# Altium PCB HW_ADHERENT_SYSCTRL_R1.PcbDoc (part 1 of 3)
Units mm, origin at the board's own origin, x right, y up, seen from the top; angles counter-clockwise.
Board outline 160 x 150 mm, 4 copper layers (Top Layer, Int1 (GND), Int2 (PWR), Bottom Layer), stack 1.369 mm thick; 228 components, 143 nets, 829 pads, 0 vias.
Unrouted connection lines stored in the file: 328.
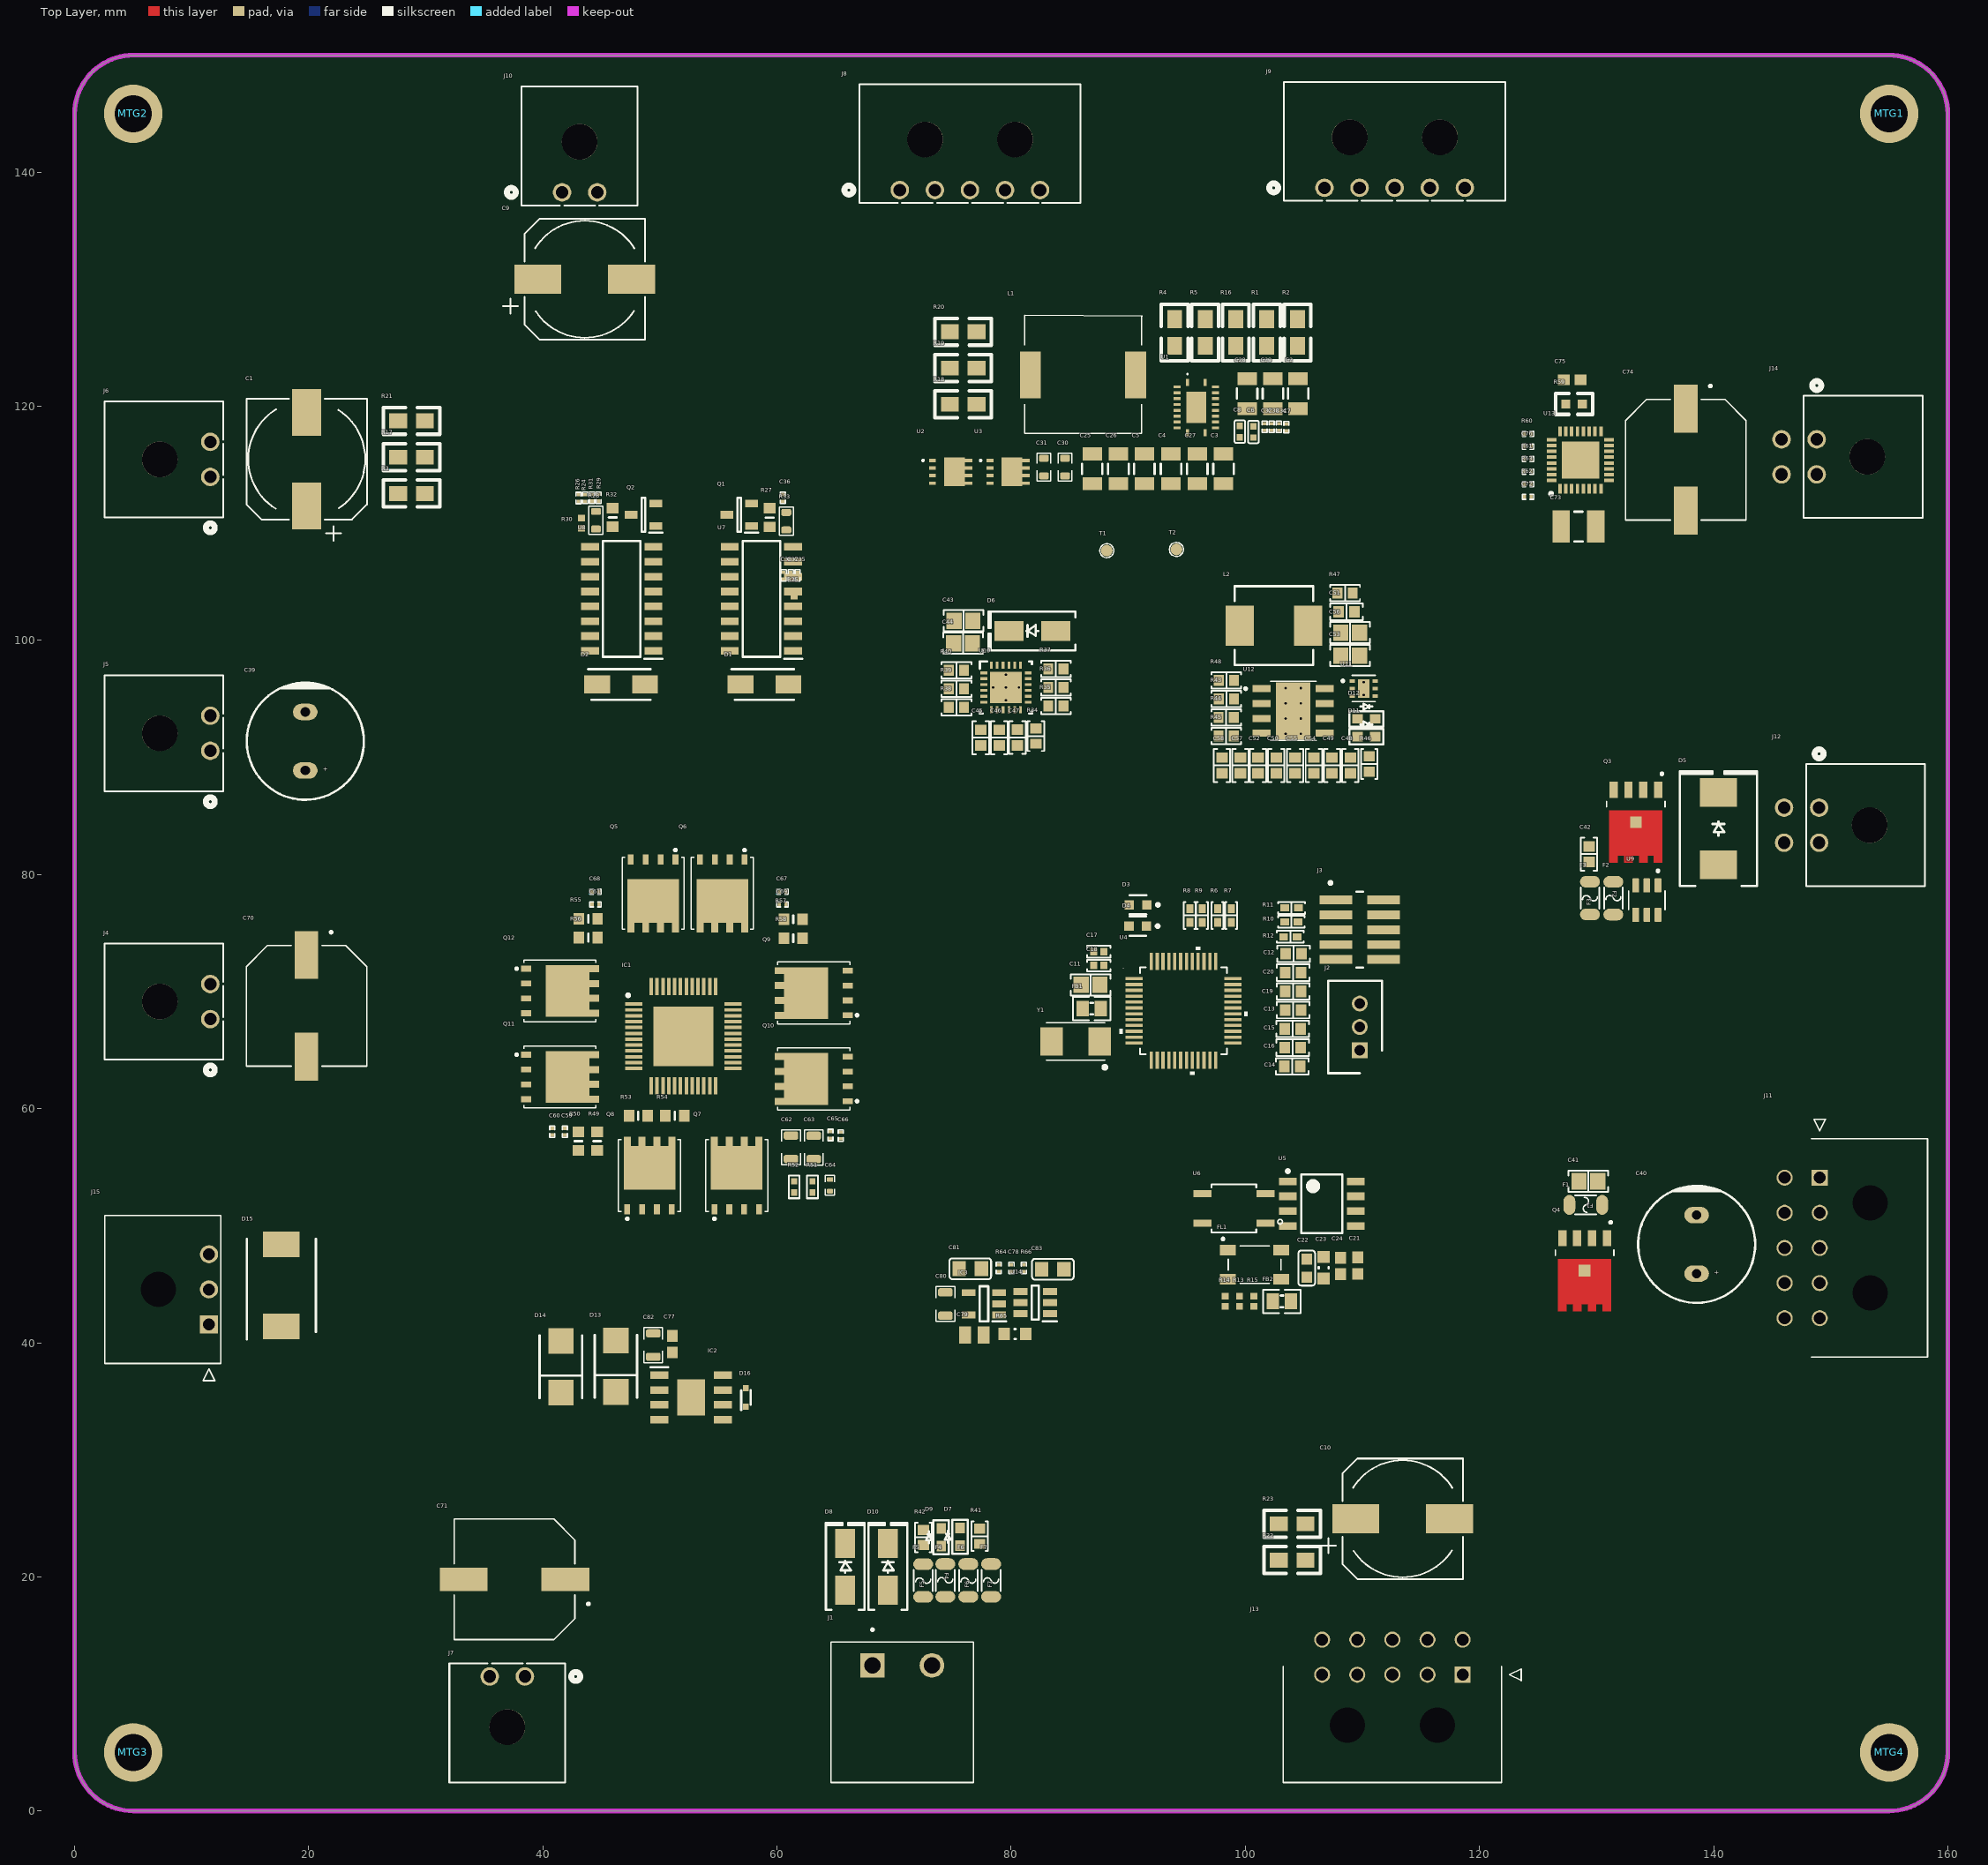
[diagram p0: Top Layer view]
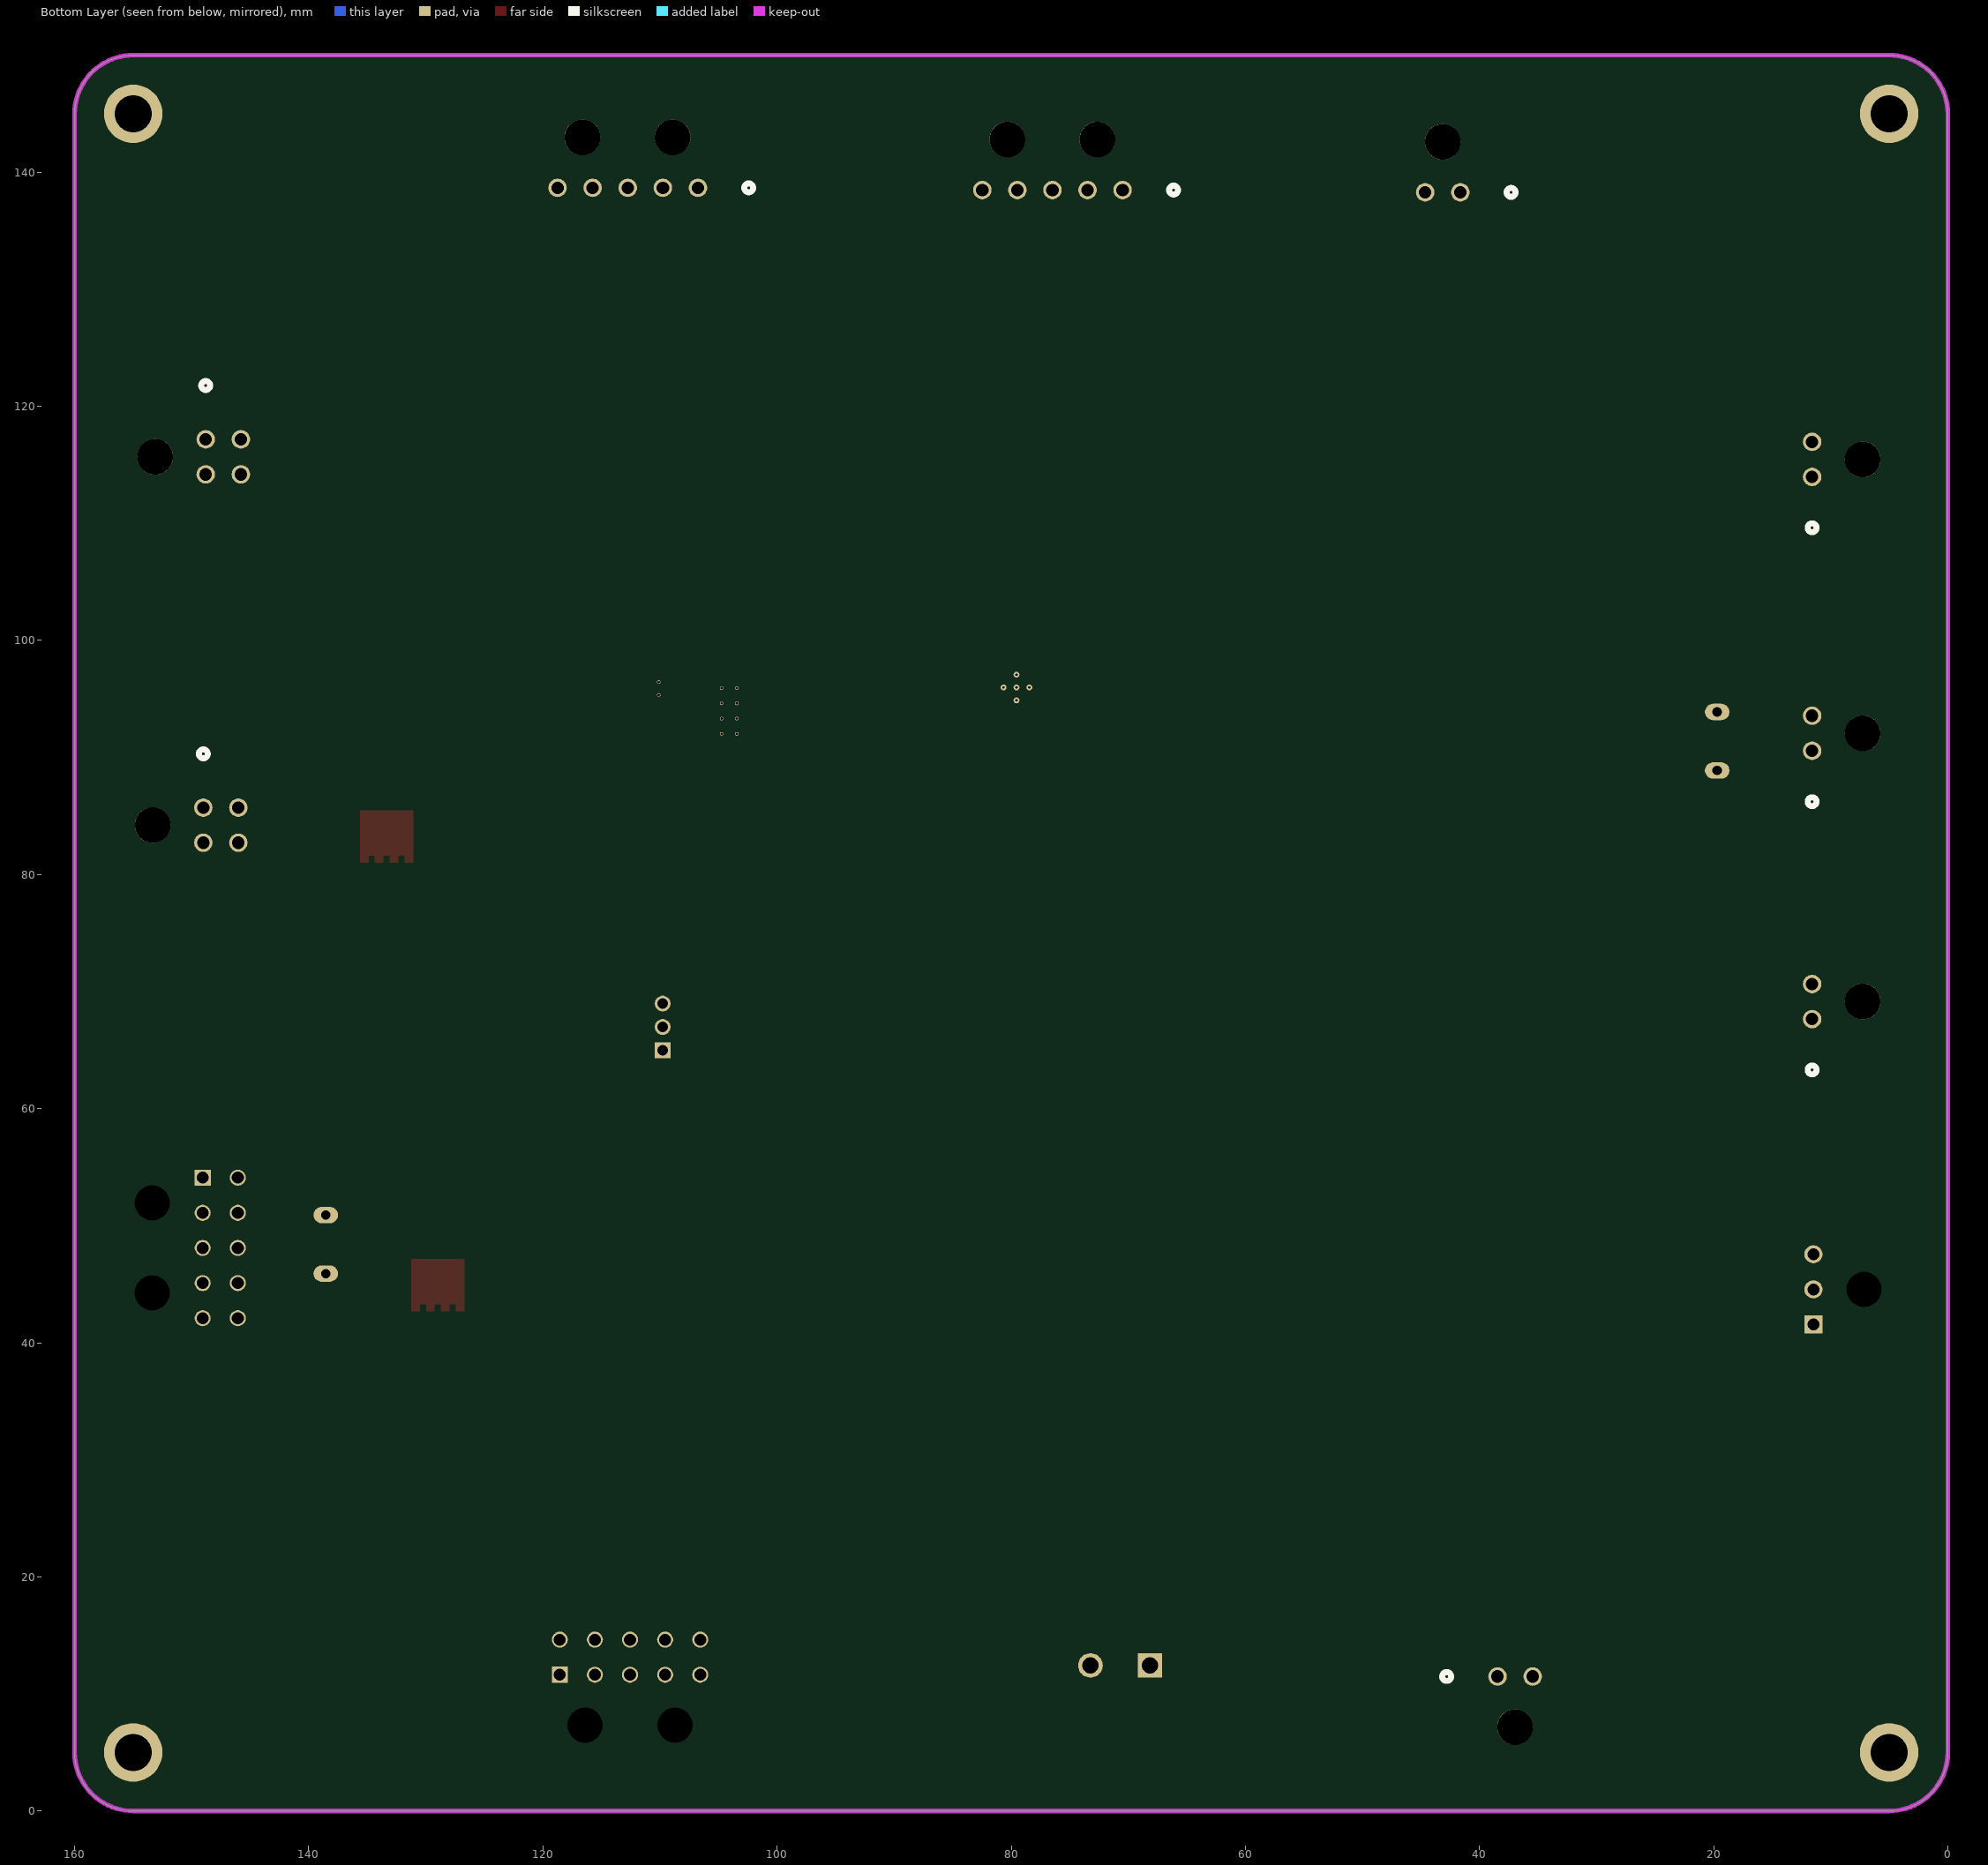
[diagram p1: Bottom Layer view, seen from below]
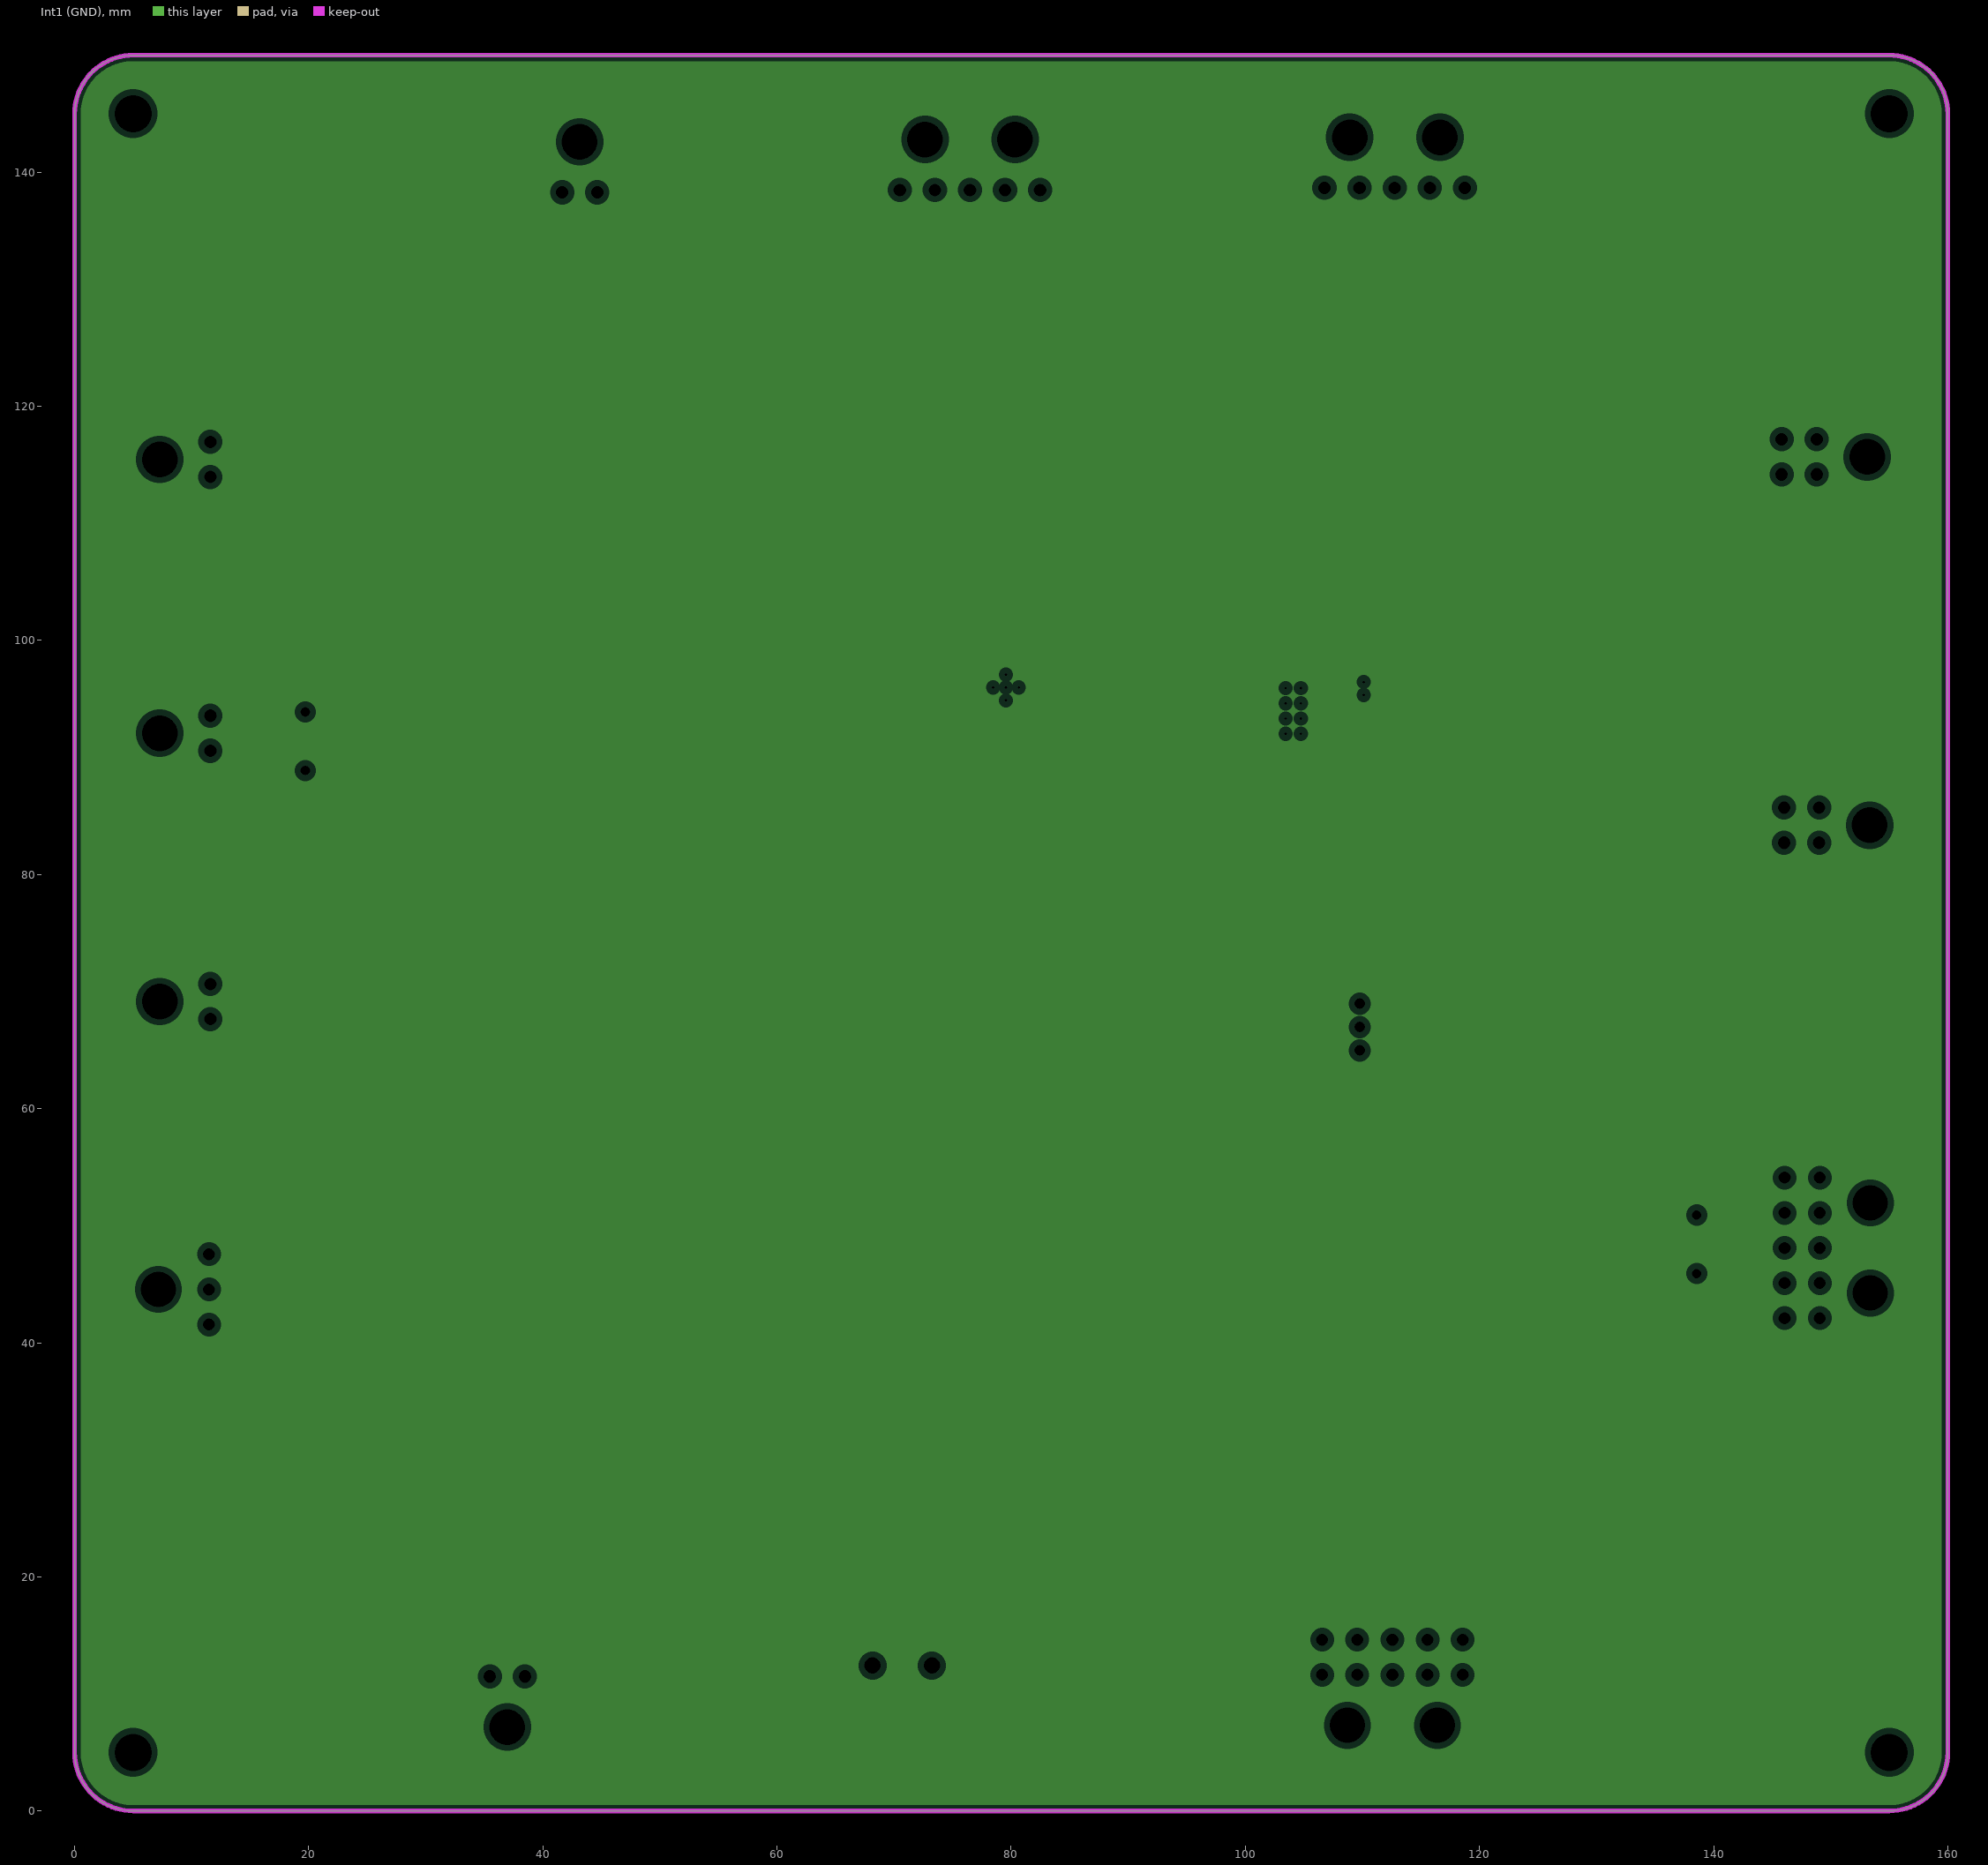
[diagram p2: Int1 (GND), clearances drawn from the general rule]
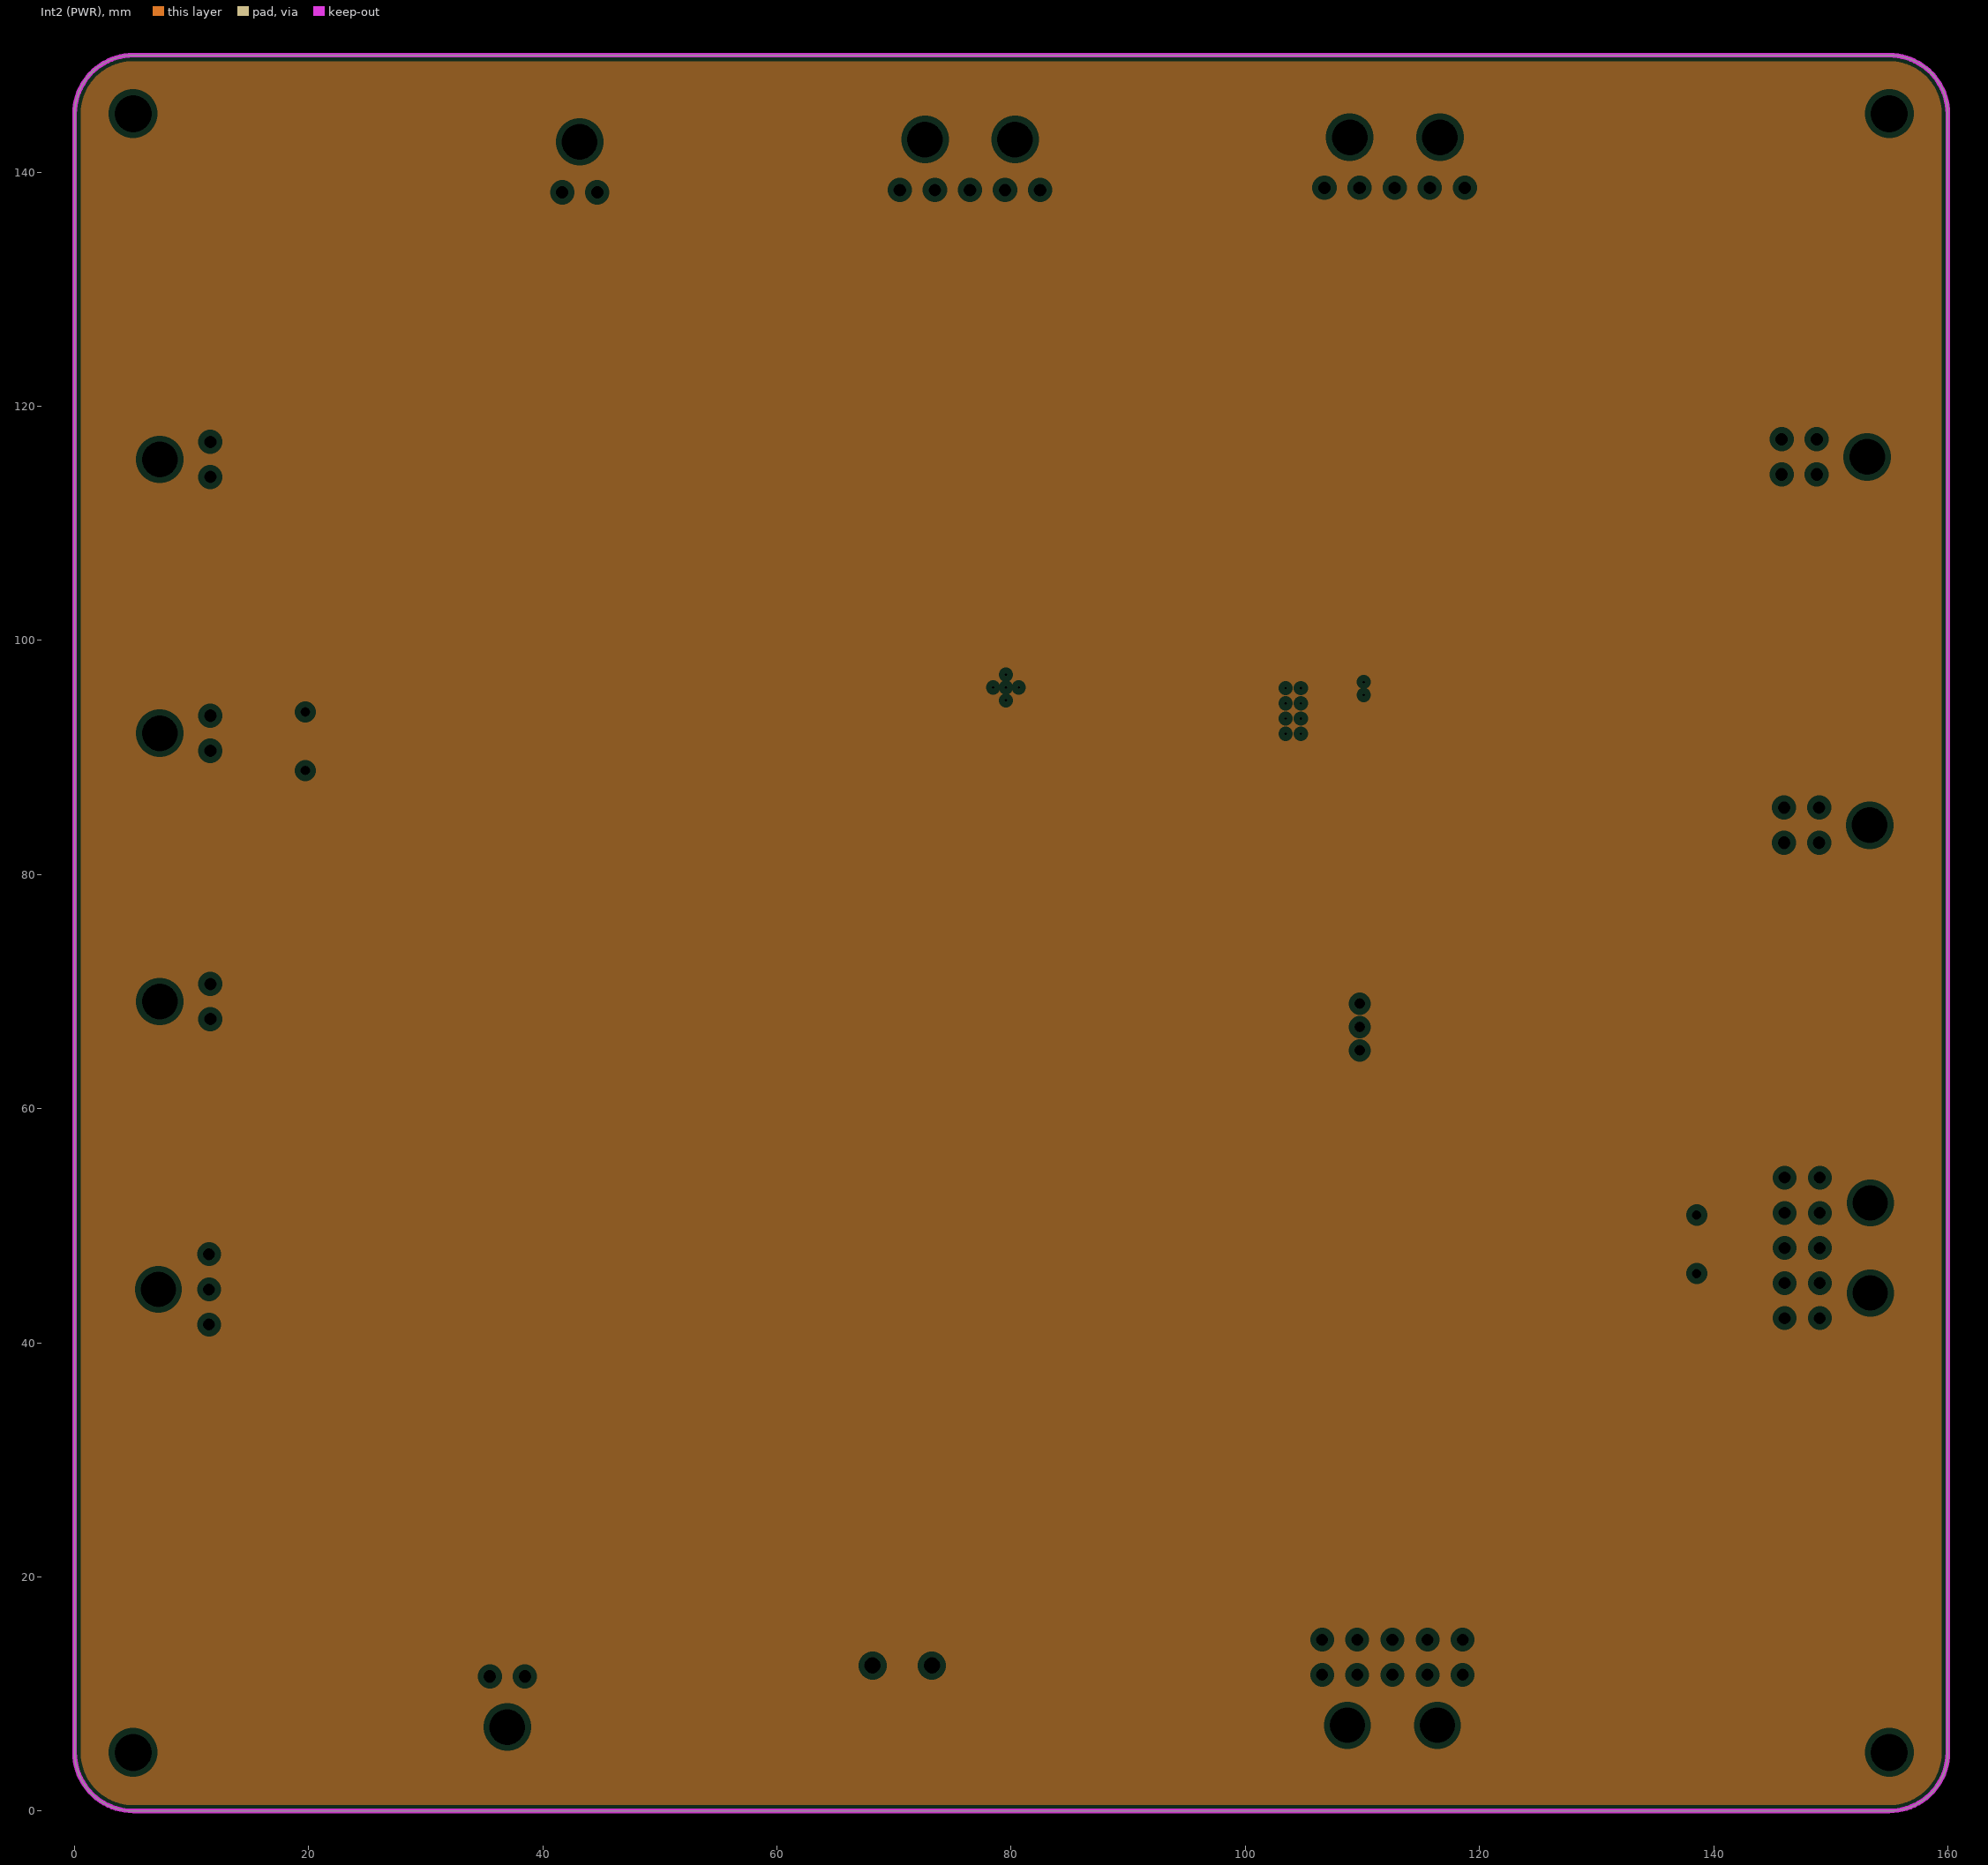
[diagram p3: Int2 (PWR), clearances drawn from the general rule]

## Layer stack, top to bottom
Top Solder: solder mask 0.0254, SM-001, Dk 4
Top Layer: signal copper 0.035
Dielectric 1: prepreg 0.1295, PP-017, Dk 4.3
Dielectric 2: prepreg 0.1295, PP-017, Dk 4.3
Int1 (GND): plane copper 0.035
Dielectric 3: core 0.7112, Core-039, Dk 4.8
Int2 (PWR): plane copper 0.035
Dielectric 4: prepreg 0.1295, PP-017, Dk 4.3
Dielectric 5: prepreg 0.1295, PP-017, Dk 4.3
Bottom Layer: signal copper 0.035
Bottom Solder: solder mask 0.0254, SM-001, Dk 4

## Board outline
0,5 ccw(c5,5) 5,0 155,0 ccw(c155,5) 160,5 160,145 ccw(c155,145) 155,150 5,150 ccw(c5,145) 0,145

## Design rules (kind name [scope] priority, off if disabled: settings)
BoardOutlineClearance [All] p1: gap=0.3 ignorepadtopadclearanceinfootprint=FALSE except(0: Arc-SplitContinuation Track-SplitContinuation SMDPad-SplitContinuation THPad-SplitContinuation Via-SplitContinuation Fill-SplitContinuation Poly-SplitContinuation Region-SplitContinuation Text-SplitContinuation)
Clearance CL_SMPS [InNetClass('SMPS_NOISY') and (IsTrack or IsArc or IsVia)] p1: gap=0.152 ignorepadtopadclearanceinfootprint=TRUE except(0.305: Arc-Poly Track-Poly SMDPad-Poly THPad-Poly Via-Poly Fill-Poly Poly-Poly Poly-Region Poly-Text Poly-Hole)
Clearance CL_CLOCK [InNetClass('CLOCK') and (IsTrack or IsArc or IsVia)] p2: gap=0.25 ignorepadtopadclearanceinfootprint=FALSE
Clearance CL_VIN [InNetClass('PWR_VIN') and (IsTrack or IsArc or IsVia)] p3: gap=0.25 ignorepadtopadclearanceinfootprint=FALSE
Clearance [All] p4: gap=0.15 ignorepadtopadclearanceinfootprint=FALSE
DiffPairsRouting DP_ZDIFF120 [InDifferentialPairClass('ZDIFF120')] p1: maxlimit=0.263 minlimit=0.263 mostfreqgap=0.263 toplayer_minwidth=0.127 toplayer_maxwidth=0.127 toplayer_prefwidth=0.127 bottomlayer_minwidth=0.127 bottomlayer_maxwidth=0.127 bottomlayer_prefwidth=0.127 impedanceprofiledriven=TRUE maxuncoupledlength=5
HoleSize [All] p1: absolutevalues=TRUE maxlimit=4 minlimit=0.2 maxpercent=80.000 minpercent=20.000
HoleToHoleClearance [All] p1: gap=0.5 allowstackedmicrovias=TRUE
MatchedLengths ML_ZDIFF120 [InDifferentialPairClass('ZDIFF120')] p1: tolerance=1 checknetsindiffpair=FALSE checkdiffpairvsdiffpair=TRUE checkxsignals=TRUE checkothers=TRUE
MinimumAnnularRing [All] p1: minimumring=0.13
MinimumSolderMaskSliver MS_U5 [InComponent('U5')] p1: minsoldermaskwidth=0.09
MinimumSolderMaskSliver [All] p2: minsoldermaskwidth=0.1
PlaneClearance [All] p1: clearance=0.508
PlaneConnect [All] p1: planeconnectstyle=Relief reliefexpansion=0.508 reliefentries=4 reliefconductorwidth=0.3 reliefairgap=0.3
PolygonConnect [All] p1: thpad.connectstyle=Relief thpad.reliefconductorwidth=0.3 thpad.reliefentries=4 thpad.polygonreliefangle="90 Angle" thpad.airgapwidth=0.3 smdpad.connectstyle=Direct smdpad.reliefconductorwidth=0.3 smdpad.reliefentries=4 smdpad.polygonreliefangle="90 Angle" smdpad.airgapwidth=0.3 via.connectstyle=Direct via.reliefconductorwidth=0.3 via.reliefentries=4 via.polygonreliefangle="90 Angle" via.airgapwidth=0.3
RoutingVias [All] p1: holewidth=0.3 width=0.6 viastyle="Through Hole" minholewidth=0.2 minwidth=0.45 maxholewidth=0.45 maxwidth=1
SilkToSilkClearance [All] p1: silktosilkclearance=0.15
SilkToSolderMaskClearance [IsPad] p1: minsilkscreentomaskgap=0.05 clearancetoexposedcopper=TRUE
SolderMaskExpansion [All] p1: expansion=0.05 istentingtop=FALSE
SupplyNets "Schematic Supply Nets_8" [InNet('+12V_SYS')] p1: voltage=0.000
SupplyNets "Schematic Supply Nets_6" [InNet('+24V_BUCK_IN')] p2: voltage=0.000
SupplyNets "Schematic Supply Nets_3" [InNet('+12')] p3: voltage=0.000
SupplyNets "Schematic Supply Nets_7" [InNet('+3V3')] p4: voltage=0.000
SupplyNets "Schematic Supply Nets_5" [InNet('GND')] p5: voltage=0.000
Width W_PWR_VIN [InNetClass('PWR_VIN')] p1: maxlimit=2 minlimit=0.4 preferedwidth=1 bottomlayer_minwidth=0.5 minimp=50.000000 maximp=50.000000 favimp=50.000000
Width W_PWR_5V [InNetClass('PWR_5V')] p2: maxlimit=2 minlimit=0.4 preferedwidth=0.6 minimp=50.000000 maximp=50.000000 favimp=50.000000
Width W_PWR_3V3 [InNetClass('PWR_3V3')] p3: maxlimit=1 minlimit=0.3 preferedwidth=0.4 minimp=50.000000 maximp=50.000000 favimp=50.000000
Width W_SMPS_SW [InNetClass('SMPS_NOISY')] p4: maxlimit=3 minlimit=0.254 preferedwidth=0.8 bottomlayer_minwidth=0.5 minimp=50.000000 maximp=50.000000 favimp=50.000000
Width W_CAN_F [InNetClass('CANF')] p5: maxlimit=0.285 minlimit=0.12 preferedwidth=0.127 minimp=50.000000 maximp=50.000000 favimp=50.000000
Width W_ZDIFF120 [InDifferentialPairClass('ZDIFF120')] p6: maxlimit=0.254 minlimit=0.09 preferedwidth=0.102 minimp=50.000000 maximp=50.000000 favimp=50.000000
Width [All] p7: maxlimit=0.5 minlimit=0.15 preferedwidth=0.2 minimp=50.000000 maximp=50.000000 favimp=50.000000
22 further rules are at their usual default settings.

## Classes and differential pairs
component class POWER_5: C48 C49 C50 C51 C52 C53 C54 C55 C56 C57 C58 D11 D12 L2 R43 R44 R45 R46 R47 R48 U11 U12
component class POWER_4: D7 D8 D9 D10 F4 F5 F6 F7 J8 J9 J10 R41 R42
component class POWER_3: C43 C44 C45 C46 C47 D6 J7 R34 R35 R36 R37 R38 R39 R40 U10
component class DRIVER_3: C70 C71 C72 C73 C74 C75 C76 D13 D14 FL J14 R59 R60 R61 R62 R63 U13
component class DRIVER_2: C59 C60 C61 C62 C63 C64 C65 C66 C67 C68 C69 IC1 Q5 Q6 Q7 Q8 Q9 Q10 Q11 Q12 R49 R50 R51 R52 R53 R54 R55 R56 R57 R58
component class DRIVER4: C77 C78 C79 C80 C81 C82 C83 D15 D16 IC2 IC3 J15 R64 R65 R66 U14
component class 09_CONNECTOR: J11 J12 J13
component class 07_CAN: C21 C22 C23 C24 FB2 FL1 R13 R14 R15 U5 U6
component class 06_DRIVER: C35 C36 C37 C38 D1 D2 Q1 Q2 R24 R25 R26 R27 R28 R29 R30 R31 R32 R33 U7 U8
component class 04_POWER_2: C39 C40 C41 C42 D5 F1 F2 F3 J1 J4 J5 J6 Q3 Q4 U9
component class 03_POWER1: C1 C2 C3 C4 C5 C6 C7 C8 C9 C10 C25 C26 C27 C28 C29 C30 C31 C32 C33 C34 L1 R1 R2 R3 R4 R5 R16 R17 R18 R19 R20 R21 R22 R23 T1 T2 U1 U2 U3
net class CAN_BUS: CAN1_N CAN1_P
differential pair class ZDIFF120: CAN1
net class CAN1: CAN1_N CAN1_P
component class 05_MCU: C11 C12 C13 C14 C15 C16 C17 C18 C19 C20 D3 D4 FB1 J2 J3 MTG1 MTG2 MTG3 MTG4 R6 R7 R8 R9 R10 R11 R12 U4 Y1
differential pair CAN1: +CAN1_P -CAN1_N

## Components (designator, comment, footprint, x,y, rotation, side; value= is the part's Value field where it differs from the comment)
C1 "100uF" "SMD 10.3x10.3x10.0mm" 19.826,115.49 r180 top
C2 "4.7uF" CAP1206 104.51,121.09 r90 top value="4.7uF 100V"
C3 "4.7uF" CAP1206 98.13,114.66 r90 top value="4.7uF 100V"
C4 "4.7uF" CAP1206 93.65,114.66 r90 top value="4.7uF 100V"
C5 "4.7uF" CAP1206 91.37,114.66 r90 top value="4.7uF 100V"
C6 "0.1uF" 0402_C 100.69,117.813 r90 top
C7 "100nF" CAPC0603X03L_C 103.51,118.21 r90 top
C8 "0.1uF" 0402_C 99.53,117.843 r90 top
C9 "100uF" "SMD 10.3x10.3x10.0mm" 43.57,130.86 r90 top
C10 "100uF" "SMD 10.3x10.3x10.0mm" 113.439,24.961 r90 top
C11 "4.7 µF" "CAP 0805_2012" 86.775,70.577 r180 top
C12 "GCM188R71H104KA57J" "CAP 0603_1608" 104.109,73.238 r180 top
C13 "GCM188R71H104KA57J" "CAP 0603_1608" 104.08,68.42 r180 top
C14 "GCM188R71H104KA57J" "CAP 0603_1608" 104.017,63.613 r180 top
C15 "GCM188R71H104KA57J" "CAP 0603_1608" 104.05,66.812 r180 top
C16 "GCM188R71H104KA57J" "CAP 0603_1608" 104.05,65.214 r180 top
C17 "8.2 pF" "CAP 0402_1005" 87.475,73.417 r180 top
C18 "8.2 pF" "CAP 0402_1005" 87.475,72.227 r180 top
C19 "1 µF" "CAP 0603_1608" 104.092,70.023 r180 top
C20 "10000 pF" "CAP 0603_1608" 104.092,71.621 r180 top
C21 "47pF" CAPC1608X100N 109.6,46.59 r90 top
C22 "10uF" 0603_C 105.239,46.38 r90 top
C23 "100nF" CAP0603 106.69,46.41 r90 top value="100nF 50V"
C24 "47pF" CAPC1608X100N 108.12,46.56 r90 top
C25 "22uF" CAP1206 86.92,114.66 r90 top value="22uF 35V"
C26 "22uF" CAP1206 89.16,114.66 r90 top value="22uF 35V"
C27 "22uF" CAP1206 95.89,114.66 r90 top value="22uF 35V"
C28 "22uF" CAP1206 100.15,121.09 r90 top value="22uF 35V"
C29 "22uF" CAP1206 102.36,121.09 r90 top value="22uF 35V"
C30 "CAP CER 8.2PF 50V C0G/NPO 0603" SMC0603 84.597,114.813 r90 top value=8.2pF
C31 "CAP CER 4.7UF 25V X5R 0603" SMC0603 82.789,114.813 r90 top value=2.2uF
C32 "120p" CAPC0603X03L_C 101.635,118.25 r90 top value=100nF
C33 "3.9nF" CAPC0603X03L_C 102.238,118.25 r90 top value=100nF
C34 "12nF" CAPC0603X03L_C 102.865,118.25 r90 top value=100nF
C35 "100nF" CAPC0603X03L_C 61.75,105.545 r270 top
C36 "10nF" CAPC0603X03L_C 60.49,112.185 r270 top
C37 "100nF" CAPC0603X03L_C 61.17,105.545 r270 top
C38 "10nF" CAPC0603X03L_C 60.57,105.545 r270 top
C39 "470µF" "CAP TH ALUM ELEC D10.00mm S5.00mm H22.00mm" 19.7,91.39 r270 top
C40 "470µF" "CAP TH ALUM ELEC D10.00mm S5.00mm H22.00mm" 138.55,48.41 r270 top
C41 "1µF" "CAP 0805_2012" 129.305,53.798 r0 top
C42 "0.47 µF" "CAP 0603_1608" 129.36,81.74 r270 top
C43 "1µF" "CAP 0805_2012" 75.92,101.682 r180 top
C44 "1µF" "CAP 0805_2012" 75.88,99.762 r180 top
C45 "0.1 µF" "CAP 0603_1608" 77.4,91.692 r90 top
C46 "0.022 µF" "CAP 0603_1608" 78.98,91.692 r90 top
C47 "10000 pF" "CAP 0603_1608" 80.53,91.697 r90 top
C48 "4.7 µF" "CAP 0603_1608" 108.975,89.315 r90 top
C49 "4.7 µF" "CAP 0603_1608" 107.405,89.315 r90 top
C50 "0.1 µF" "CAP 0603_1608" 102.645,89.315 r90 top
C51 "0.1 µF" "CAP 0603_1608" 108.65,102.445 r0 top
C52 "22 µF" "CAP 0603_1608" 101.085,89.315 r90 top
C53 "1µF" "CAP 0805_2012" 108.95,98.705 r180 top
C54 "10 µF" "CAP 0603_1608" 105.855,89.315 r90 top
C55 "22 µF" "CAP 0603_1608" 104.245,89.315 r90 top
C56 "1µF" "CAP 0805_2012" 108.95,100.665 r180 top
C57 "22 µF" "CAP 0603_1608" 99.575,89.315 r90 top
C58 "22 µF" "CAP 0603_1608" 98.005,89.315 r90 top
C59 "100nF" CAPC0603X03L_C 41.873,58.035 r270 top
C60 "22nF" CAPC0603X03L_C 40.8,58.035 r270 top
C61 "100nF" CAPC0603X03L_C 44.485,77.46 r180 top
C62 "CAP CER 4.7UF 50V X5R 0805" SMC0805 61.19,56.7 r90 top value=4.7uF
C63 "CAP CER 4.7UF 50V X5R 0805" SMC0805 63.128,56.689 r90 top value=4.7uF
C64 "CAP CER 0.47UF 10V X5R 0402" CAP0402(1005)x0.5 64.516,53.451 r90 top value=470nF
C65 "100nF" CAPC0603X03L_C 64.55,57.75 r90 top
C66 "100nF" CAPC0603X03L_C 65.443,57.705 r90 top
C67 "100nF" CAPC0603X03L_C 60.47,78.533 r180 top
C68 "100nF" CAPC0603X03L_C 44.485,78.533 r180 top
C69 "100nF" CAPC0603X03L_C 60.47,77.46 r180 top
C70 "47uF 80V" CAP_EEEFK1K470P 19.814,68.78 r270 top
C71 "100uF" CAP_EEEFK1J101P 37.58,19.79 r180 top
C72 "100nF" CAPC0603X03L_C 124.14,112.274 r180 top
C73 "CAP CER 47UF 16V X5R 1210" CAP1210 128.45,109.73 r180 top value="47uF 16V"
C74 "100uF" CAP_EEEFK1J101P 137.62,115.44 r270 top
C75 "2.2uF" CAPC1608X100N 127.91,122.27 r0 top
C76 "22nF" CAPC0603X03L_C 124.14,116.566 r180 top
C77 "47pF" CAPC1608X100N 51.057,39.881 r90 top
C78 "100nF" CAPC0603X03L_C 80.017,46.382 r270 top
C79 "4.7nF" CAP0805 76.857,40.672 r0 top value="4.7nF 1kV"
C80 "CAP CER 4.7UF 50V X5R 0805" SMC0805 74.377,43.312 r270 top value="4.7uF 50V"
C81 "47uF" 0805_C 76.507,46.322 r180 top
C82 "CAP CER 4.7UF 50V X5R 0805" SMC0805 49.427,39.802 r270 top value="4.7uF 50V"
C83 "47uF" 0805_C 83.557,46.282 r180 top
D1 "SS36A" DIOM5026X262N 58.93,96.24 r0 top
D2 "SS36A" DIOM5026X262N 46.68,96.24 r0 top
D3 "LED RED CLEAR SMD" Lite-On_RED_0603 90.83,77.417 r180 top
D4 "LED RED CLEAR SMD" Lite-On_RED_0603 90.81,75.597 r180 top
D5 "SMDJ33A" "DO214AB SMC" 140.41,83.92 r90 top
D6 "SMAJ33A" "DO214AC SMA" 81.8,100.812 r180 top
D7 "LTST-C191KGKT" LED0603 75.624,23.418 r90 top
D8 "SMAJ33A" "DO214AC SMA" 65.824,20.86 r90 top
D9 "LTST-C191KGKT" LED0603 74.024,23.387 r90 top
D10 "SMAJ33A" "DO214AC SMA" 69.469,20.86 r90 top
D11 "LTST-C191KGKT" LED0603 110.341,91.789 r0 top
D12 "LTST-C191KGKT" LED0603 110.341,93.305 r0 top
D13 "SMBJ33A" SMBJ12A 46.234,37.994 r90 top
D14 "SMBJ24A" SMBJ12A 41.53,37.95 r90 top
D15 "B560C" DIOM7959X250N 17.652,44.9 r90 top
D16 "ESD5Z5V0" SODFL1608X70N 57.34,35.33 r90 top
F1 "4A/72V" F1206 129.08,51.778 r180 top
F2 "4A/72V" F1206 131.435,77.98 r270 top
F3 "4A/72V" F1206 129.44,77.99 r90 top
F4 "4A/72V" F1206 74.371,19.698 r270 top
F5 "4A/72V" F1206 72.481,19.688 r90 top
F6 "4A/72V" F1206 76.341,19.698 r90 top
F7 "4A/72V" F1206 78.281,19.698 r90 top
FB1 "BLM21PG121SN1D" INDC2012X11L 86.874,68.547 r0 top value=120R/0.55A
FB2 "BLM21PG121SN1D" INDC2012X11L 103.13,43.53 r0 top value=120R/0.55A
FL1 "ACT45B-510-2P-TL003" FIL_ACT45B-510-2P-TL003 100.79,46.67 r0 top
IC1 "TMC5160-TA" QFP50P900X900X120-49N 51.999,66.187 r0 top
IC2 "TPS54560BDDAR" SOIC127P600X170-9N 52.66,35.33 r0 top
IC3 "74AHCT1G125W5-7" SOT95P285X140-5N 77.67,43.33 r180 top
J1 "1757242" PHOENIX_1757242 70.69,8.433 r0 top
J2 "SWR201-NRTN-S03-SA-WH" SHDR3W50P0X200_1X3_790X460X630P 109.77,64.977 r90 top
J3 "CONN HEADER SMD 10POS 1.27MM" Samtec_0_MFG 109.77,75.287 r270 top
J4 "436500200" CONN_SD-43650-001_02_MOL 11.588,67.651 r270 top
J5 "436500200" CONN_SD-43650-001_02_MOL 11.588,90.571 r270 top
J6 "436500200" CONN_SD-43650-001_02_MOL 11.588,113.971 r270 top
J7 "436500200" CONN_SD-43650-001_02_MOL 38.459,11.488 r0 top
J8 "436500500" CONN_SD-43650-001_05_MOL 70.481,138.482 r180 top
J9 "436500500" CONN_SD-43650-001_05_MOL 106.761,138.672 r180 top
J10 "436500200" CONN_SD-43650-001_02_MOL 41.641,138.282 r180 top
J11 "430451000" 430451010 149.062,54.1 r90 top
J12 "0430450400" CONN_SD-43045-001_04_MOL 149.012,85.72 r90 top
J13 "430451000" 430451010 118.56,11.638 r0 top
J14 "0430450400" CONN_SD-43045-001_04_MOL 148.802,117.189 r90 top
J15 "43650-0300" 436500300 11.479,41.56 r270 top
L1 "6.8uH" SRU10386R2Y 86.14,122.7 r0 top
L2 "FIXED IND 8.2UH 4A 68 MOHM SMD" Vishay_IHLP-2525CZ-FP_2_413x3_429-3D_3_0_MFG 102.44,101.275 r0 top value=8.2uH
MTG1 "Mounting Hole, 3MM" MTG-PTH-3MM 155,145 r0 top
MTG2 "Mounting Hole, 3MM" MTG-PTH-3MM 5,145 r90 top
MTG3 "Mounting Hole, 3MM" MTG-PTH-3MM 5,5 r90 top
MTG4 "Mounting Hole, 3MM" MTG-PTH-3MM 155,5 r90 top
Q1 "DMN6140L-7" SOT96P240X110-3N 56.774,110.741 r180 top
Q2 "DMN6140L-7" SOT96P240X110-3N 48.596,110.741 r180 top
Q3 "CSD18540Q5B" TRANS_CSD18540Q5B 133.356,84.477 r270 top
Q4 "CSD18540Q5B" TRANS_CSD18540Q5B 128.981,46.159 r270 top
Q5 "BSC072N08NS5" BSC080N03LSG 49.412,78.63 r180 top
Q6 "BSC072N08NS5" BSC080N03LSG 55.32,78.63 r180 top
Q7 "BSC072N08NS5" BSC080N03LSG 56.55,54.056 r0 top
Q8 "BSC072N08NS5" BSC080N03LSG 49.104,54.056 r0 top
Q9 "BSC072N08NS5" BSC080N03LSG 63.371,69.885 r90 top
Q10 "BSC072N08NS5" BSC080N03LSG 63.371,62.538 r90 top
Q11 "BSC072N08NS5" BSC080N03LSG 41.222,62.708 r270 top
Q12 "BSC072N08NS5" BSC080N03LSG 41.222,70.055 r270 top
R1 "200k" 0805 101.83,125.174 r90 top
R2 "4.7" 0805 104.45,125.174 r90 top
R3 "14.3k" 0805 29.926,112.559 r180 top
R4 "24.9k" 0805 93.967,125.174 r90 top
R5 "0 Ohms" 0805 96.57,125.174 r90 top
R6 "10 kOhms" "RES 0402_1005" 97.62,76.507 r90 top
R7 "10 kOhms" "RES 0402_1005" 98.79,76.507 r90 top
R8 "10 kOhms" "RES 0402_1005" 95.26,76.507 r90 top
R9 "10 kOhms" "RES 0402_1005" 96.31,76.507 r90 top
R10 "0 Ohms" "RES 0402_1005" 103.931,75.967 r180 top
R11 "1 kOhms" "RES 0402_1005" 103.945,77.156 r180 top
R12 "1 kOhms" "RES 0402_1005" 103.846,74.687 r180 top
R13 "56 Ohms" RES_0402 99.502,43.533 r90 top
R14 "56 Ohms" RES_0402 98.294,43.533 r90 top
R15 "330 Ohms" RES_0402 100.71,43.533 r90 top
R16 "0 Ohms" 0805 99.18,125.174 r90 top
R17 "750 Ohms" 0805 29.926,115.658 r180 top
R18 "0 Ohms" 0805 77.046,120.173 r180 top
R19 "10k" 0805 77.046,123.272 r180 top
R20 "390" 0805 77.046,126.371 r180 top
R21 "6.81k" 0805 29.926,118.757 r180 top
R22 "10k" 0805 105.146,21.436 r180 top
R23 "715" 0805 105.146,24.535 r180 top
R24 "10kOhms" RESC0603X03L_C 43.61,112.18 r270 top
R25 "4.7kOhms" RES_0402 61.46,103.35 r270 top
R26 "1kOhms" RESC0603X03L_C 43.04,112.17 r270 top
R27 "100 Ohms" RESC1608X55N 59.37,110.5 r270 top
R28 "RES 180K OHM 1% 1/10W 0603" SMR0603 44.53,110.27 r270 top value=100k
R29 "10kOhms" RESC0603X03L_C 44.76,112.19 r270 top
R30 "4.7kOhms" RES_0402 43.29,110.025 r270 top
R31 "1kOhms" RESC0603X03L_C 44.19,112.19 r270 top
R32 "100 Ohms" RESC1608X55N 45.96,110.51 r270 top
R33 "RES 180K OHM 1% 1/10W 0603" SMR0603 60.79,110.19 r270 top value=100k
R34 "110 kOhms" "RES 0603_1608" 82.11,91.827 r90 top
R35 "110 kOhms" "RES 0603_1608" 83.82,94.402 r180 top
R36 "17.8 kOhms" "RES 0603_1608" 83.82,95.982 r180 top
R37 "3.57 kOhms" "RES 0603_1608" 83.82,97.572 r180 top
R38 "7.15 kOhms" "RES 0603_1608" 75.32,94.287 r180 top
R39 "10 kOhms" "RES 0603_1608" 75.32,95.867 r180 top
R40 "1 kOhms" "RES 0603_1608" 75.32,97.457 r180 top
R41 "1 kOhms" "RES 0603_1608" 77.294,23.468 r90 top
R42 "1 kOhms" "RES 0603_1608" 72.503,23.365 r90 top
R43 "110 kOhms" "RES 0603_1608" 98.38,95.005 r0 top
R44 "110 kOhms" "RES 0603_1608" 98.37,93.435 r0 top
R45 "24.9 kOhms" "RES 0603_1608" 98.37,91.835 r0 top
R46 "2.2 kOhms" "RES 0603_1608" 110.575,89.445 r90 top
R47 "1 kOhms" "RES 0603_1608" 108.52,104.045 r180 top
R48 "10 kOhms" "RES 0603_1608" 98.382,96.579 r0 top
R49 "10 Ohms" RESC1608X55N 44.633,57.22 r90 top
R50 "10 Ohms" RESC1608X55N 43.025,57.22 r90 top
R51 "2.2K" 0402_R 63.025,53.31 r90 top
R52 "0R" 0402_R 61.45,53.31 r90 top
R53 "10 Ohms" RESC1608X55N 48.15,59.39 r180 top
R54 "10 Ohms" RESC1608X55N 51.26,59.39 r180 top
R55 "10 Ohms" RESC1608X55N 43.87,76.225 r180 top
R56 "10 Ohms" RESC1608X55N 43.87,74.617 r180 top
R57 "10 Ohms" RESC1608X55N 61.38,76.173 r180 top
R58 "10 Ohms" RESC1608X55N 61.38,74.565 r180 top
R59 "24k" 0603 127.383,120.2 r0 top
R60 "10kOhms" RESC0603X03L_C 124.14,117.639 r180 top
R61 "10kOhms" RESC0603X03L_C 124.14,115.493 r180 top
R62 "10kOhms" RESC0603X03L_C 124.14,113.347 r180 top
R63 "10kOhms" RESC0603X03L_C 124.14,114.42 r180 top
R64 "10kOhms" RESC0603X03L_C 78.944,46.382 r270 top
R65 "100k %1" RESIS_0603 80.327,40.742 r0 top
R66 "10kOhms" RESC0603X03L_C 81.09,46.382 r270 top
T1 "SMD" TEST_POINT 88.16,107.675 r0 top
T2 "SMD" TEST_POINT 94.11,107.775 r0 top
U1 "LM5146RGYR" LM5146RGYR 95.81,119.91 r0 top
U2 "CSD18543Q3A" CSD18543Q3A 74.824,114.408 r0 top
U3 "CSD18543Q3A" CSD18543Q3A 79.732,114.408 r0 top
U4 "STM32F103C8T6" LQFP48_STM 94.72,68.357 r0 top
U5 "SN65HVD232DR" SOIC8 106.53,51.88 r0 top
U6 "CPC1014NTR" 4-SOP 99.03,51.48 r180 top
U7 "AM26C31IDR" SOIC127P600X175-16N 58.661,103.548 r180 top
U8 "AM26C31IDR" SOIC127P600X175-16N 46.733,103.548 r180 top
U9 "LM74700QDBVRQ1" SOT95P280X145-6N/LM74700QDBVRQ1 134.296,77.813 r270 top
U10 "TPS16637RGER" RGE0024H 79.55,95.982 r0 top
U11 "TLV75733PDRVR" VREG_TLV75733PDRVR 110.105,95.895 r0 top
U12 "LMR33630ADDAR" VREG_LM5017MR/NOPB 104.09,93.975 r0 top
U13 "TMC2240ATJ+" QFN50P500X500X80-33N 128.62,115.41 r90 top
U14 "INA181A2IDBVR" SOT95P280X145-6N 82.053,43.43 r180 top
Y1 "ECS-80-8-30Q-VS-TR" XTAL_ECS-80-8-30Q-VS-TR 85.5,65.737 r180 top

## Footprints (in the part's own frame and the unit in brackets; to place one, negate y for a bottom-side part, rotate by r counter-clockwise, add the part's x,y. Pads: shape width x height; smd on the part's side, far side on the other; paste and mask are expansions set on the pad)
4-SOP [mm] "CPC1014NTR"
  rect 1.54x0.6 smd: 1(-2.695,1.27) 2(-2.695,-1.27) 3(2.695,-1.27) 4(2.695,1.27)
  silkscreen extent -4.14,-2.05 1.91,2.05, body extent -3.15,-2.15 3.05,2.15, height 2.09
0402_C [mil] "MODIFIED BY DN_MH - 16JAN17; CHECKED BY DN_TN - 18JAN17"
  rect 22x20 smd mask+2.5: 1(-19,0) 2(19,0)
  silkscreen extent -38,-18 38,18, body extent -20,-10 20,10, height 15
0402_R [mil] "MODIFIED BY DN_MH - 16JAN17;CHECKED BY DN_TN - 18JAN17;CHECKED BY DN_QN - 20FEB19"
  rect 22x20 smd mask+2.5: 1(-19,0) 2(19,0)
  silkscreen extent -38,-18 38,18, body extent -20,-10 20,10, height 15
0603 [mil] "SMD CAPACITOR"
  rect 30x30 smd: 1(0,0) 2(55,0)
  silkscreen extent -35,-35 90,35, body extent -5,-17 62,19, height 31
0603_C [mil] "CHECKED BY DN_TN - 19FEB19"
  rect 37x36 smd mask+2.5: 1(-30.5,0) 2(30.5,0)
  silkscreen extent -59,-28 59,28, body extent -31,-16 31,16, height 32
0805 [mil]
  rect 60x50 smd: 1(0,0) 2(90,0)
  silkscreen extent -50,-45 140,45, body extent 4,-29 90,28, height 49
0805_C [mil] "MODIFIED BY DN_MH - 16JAN17;CHECKED BY DN_TN - 18JAN17"
  rect 45x50 smd mask+2.5: 1(-37.5,0) 2(37.5,0)
  silkscreen extent -70,-35 70,35, body extent -39,-25 39,25, height 31
430451010 [mm]
  rect 1.37x1.37 hole 1.02: 1(0,0)
  round 1.37 hole 1.02: 2(-3,0) 3(-6,0) 4(-9,0) 5(-12,0) 6(0,3) 7(-3,3) 8(-6,3) 9(-9,3) 10(-12,3)
  round 1.5 hole 3 unplated: 11(-2.15,-4.32) 12(-9.85,-4.32)
  silkscreen extent -15.33,-9.21 5,0.7, body extent -15.58,-8.9 3.57,3.33, height 8.71
436500300 [mm]
  rect 1.55x1.55 hole 1.02: 1(0,0)
  round 1.55 hole 1.02: 2(-3,0) 3(-6,0)
  round 1.5 hole 3 unplated: 4(-3,-4.32)
  silkscreen extent -9.33,-8.9 4.8,1, body extent -9.28,-9.01 3.36,-0.14, height 12.2
BSC080N03LSG [mm]
  rect 0.6x0.8 smd: D(-1.905,3.163) D(-0.635,3.163) D(0.635,3.163) D(1.905,3.163)
  rect 4.41x3.75 smd: D(0,0.888)
  rect 0.5x0.85 smd: G(1.905,-2.662) S(-1.905,-2.662) S(-0.635,-2.662) S(0.635,-2.662)
  silkscreen extent -2.65,-3.56 2.65,3.31, body extent -2.7,-3.08 2.69,3.07, height 1
CAP0402(1005)x0.5 [mm]
  rrect25% 0.4x0.5 smd mask+0.102: 1(-0.5,0) 2(0.5,0)
  silkscreen extent -0.85,-0.4 0.85,0.4, body extent -0.5,-0.25 0.5,0.25, height 0.51
CAP0603 [mm] "CAPACITOR 0603"
  rect 1x1.05 smd: 1(-0.925,0) 2(0.925,0)
  silkscreen extent -0.05,-0.43 0.05,0.43, body extent -0.8,-0.4 0.8,0.4, height 0.8
CAP0805 [mm]
  rect 1.02x1.47 smd: 1(-0.8,0) 2(0.8,0)
  body extent -1,-0.63 1,0.63, height 1.45
CAP1206 [mm]
  rect 1.105x1.658 smd paste+0 mask+0: 1(-1.276,0) 2(1.276,0)
  silkscreen extent -0.42,-0.88 0.42,0.88, body extent -1.6,-0.8 1.6,0.8, height 1.4
CAP1210 [mm]
  rect 1.5x2.75 smd: 1(-1.475,0) 2(1.475,0)
  silkscreen extent -0.35,-1.28 0.35,1.27, body extent -1.6,-1.25 1.6,1.25, height 1.8
"CAP 0402_1005" [mm] "Chip Capacitor, 2-Leads, Body 1.02x0.51mm, IPC Medium Density"
  rect 0.6x0.64 smd: 1(-0.44,0) 2(0.44,0)
  silkscreen extent -1,-0.5 1,0.5, body extent -0.5,-0.26 0.5,0.26, height 0.52
"CAP 0603_1608" [mm] "Chip Capacitor, 2-Leads, Body 1.60x0.80mm, IPC Medium Density"
  rect 0.9x1 smd: 1(-0.675,0) 2(0.675,0)
  silkscreen extent -1.4,-0.7 1.4,0.7, body extent -0.8,-0.41 0.8,0.41, height 0.82
"CAP 0805_2012" [mm] "Chip Capacitor, 2-Leads, Body 2.00x1.20mm, IPC Medium Density"
  rect 1.3x1.4 smd: 1(-0.8,0) 2(0.8,0)
  silkscreen extent -1.7,-0.9 1.7,0.9, body extent -1,-0.64 1,0.64, height 1.26
"CAP TH ALUM ELEC D10.00mm S5.00mm H22.00mm" [mm] "10mm Diameter 5mm Lead Spacing Aluminum Electrolytic Capacitors Radial, Can"
  oval 1.4x2.1 hole 0.8: 1(2.5,0) 2(-2.5,0)
  silkscreen extent -5,-5 5,5, body extent -5.01,-5 5,5, height 22
CAP_EEEFK1J101P [mm]
  rect 4.1x2 smd: 1(-4.35,0) 2(4.35,0)
  silkscreen extent -6.4,-5.15 5.15,5.15, body extent -5.85,-5.15 5.85,5.15, height 10.3
CAP_EEEFK1K470P [mm]
  rect 4.1x2 smd: 1(-4.35,0) 2(4.35,0)
  silkscreen extent -6.4,-5.15 5.15,5.15, body extent -5.85,-5.15 5.85,5.15, height 10.2
CAPC0603X03L_C [mm] "Chip Capacitor, 2-Leads, Body 0.6x0.3mm, IPC High Density"
  rect 0.27x0.3 smd mask+0.05: 1(-0.285,0) 2(0.285,0)
  silkscreen extent -0.49,-0.22 0.49,0.22, body extent -0.3,-0.15 0.3,0.15, height 0.3
CAPC1608X100N [mm]
  rect 1.01x0.93 smd paste+0 mask+0.102: 1(-0.709,0) 2(0.709,0)
  body extent -0.79,-0.5 0.81,0.5, height 0.8
CONN_SD-43045-001_04_MOL [mil]
  round 62 hole 42 mask+4.02: 1(0,0) 2(-118,0) 3(0,118) 4(-118,118)
  round 120 hole 120 unplated mask+0: ""(-59,-170)
  silkscreen extent -264,-356 196,44, body extent -260,-351 140,131, height 345
CONN_SD-43650-001_02_MOL [mil]
  round 62 hole 42 mask+4.02: 1(0,0) 2(-118,0)
  round 120 hole 120 unplated mask+0: ""(-59,-170)
  silkscreen extent -254,-356 186,44, body extent -245,-350 135,40, height 219
CONN_SD-43650-001_05_MOL [mil]
  round 62 hole 42 mask+4.02: 1(0,0) 2(-118,0) 3(-236,0) 4(-354,0) 5(-472,0)
  round 120 hole 120 unplated mask+0: ""(-388,-170) ""(-85,-170)
  silkscreen extent -608,-356 186,44, body extent -599,-355 135,35, height 219
CSD18543Q3A [mm]
  rect 1.775x2.45 smd: D(0.327,0)
  rect 0.635x0.3 smd: D(1.532,-0.975) D(1.532,-0.325) D(1.532,0.325) D(1.532,0.975)
  rect 0.6x0.3 smd: G(-1.55,-0.975) S(-1.55,-0.325) S(-1.55,0.325) S(-1.55,0.975)
  silkscreen extent -2.4,0.93 -2.3,1.02, body extent -1.65,-1.66 1.65,1.66, height 0.9
DIOM5026X262N [mm]
  rect 2.2x1.55 smd: 1(-2.05,0) 2(2.05,0)
  silkscreen extent -2.83,-1.31 2.52,1.31, body extent -2.52,-1.31 2.52,1.31, height 2.62
DIOM7959X250N [mm]
  rect 2.2x3.1 smd: 1(-3.5,0) 2(3.5,0)
  silkscreen extent -4.6,-2.95 3.97,2.95, body extent -3.97,-2.95 3.97,2.95, height 2.5
"DO214AB SMC" [mm] "Molded Diode, 2-Leads, Body 6.85x5.90mm, IPC Medium Density"
  rect 2.45x3.15 smd: 1(-3.1,0) 2(3.1,0)
  silkscreen extent -4.9,-3.3 4.9,3.3, body extent -3.97,-2.95 3.97,2.95, height 2.6
"DO214AC SMA" [mm] "Molded Diode, 2-Leads, Body 4.30x2.60mm, IPC Medium Density"
  rect 2.5x1.7 smd: 1(-2,0) 2(2,0)
  silkscreen extent -3.68,-1.65 3.75,1.65, body extent -2.6,-1.37 2.6,1.37, height 2.4
F1206 [mm]
  oval 1x1.7 smd: 1(-1.397,0) 2(1.397,0)
  silkscreen extent -0.9,-0.8 0.9,0.8, body extent -2,-0.9 2,0.9, height 3.81
FIL_ACT45B-510-2P-TL003 [mm]
  rect 1.35x0.9 smd: 1(-2.275,1.25) 2(-2.275,-1.25) 3(2.275,-1.25) 4(2.275,1.25)
  silkscreen extent -2.8,-1.6 2.25,2.3, body extent -2.25,-1.6 2.25,1.6, height 3
INDC2012X11L [mm] "Chip Inductor, 2-Leads, Body 2.0x1.3mm, IPC High Density"
  rect 1.05x1.35 smd: 1(-0.775,0) 2(0.775,0)
  silkscreen extent -1.6,-1 1.6,1, body extent -1,-0.63 1,0.63, height 1.25
LED0603 [mil] "LED0603"
  rect 36x32 smd: 1(-29.5,0) 2(29.5,0)
  silkscreen extent -58,-26 58,51, body extent -32,-16 32,16, height 43
Lite-On_RED_0603 [mm]
  rect 0.8x0.8 smd paste+0 mask+0: 1(-0.75,0) 2(0.75,0)
  silkscreen extent -1.83,-0.82 0.7,0.82, body extent -0.8,-0.4 0.8,0.4, height 0.45
LM5146RGYR [mm]
  rect 0.25x0.6 smd: 1(-0.75,2.15) 10(-0.75,-2.15) 11(0.75,-2.15) 20(0.75,2.15)
  rect 0.6x0.25 smd: 2(-1.65,1.75) 3(-1.65,1.25) 4(-1.65,0.75) 5(-1.65,0.25) 6(-1.65,-0.25) 7(-1.65,-0.75) 8(-1.65,-1.25) 9(-1.65,-1.75) 12(1.65,-1.75) 13(1.65,-1.25) 14(1.65,-0.75) 15(1.65,-0.25) 16(1.65,0.25) 17(1.65,0.75) 18(1.65,1.25) 19(1.65,1.75)
  rect 1.7x2.7 smd: 21(0,0)
  silkscreen extent -0.8,2.8 -0.7,2.9, body extent -1.75,-2.25 1.75,2.25, height 1
LQFP48_STM [mil]
  rect 58x11 smd paste+0 mask+0: 1(-166,108.27) 2(-166,88.58) 3(-166,68.9) 4(-166,49.21) 5(-166,29.53) 6(-166,9.84) 7(-166,-9.84) 8(-166,-29.53) 9(-166,-49.21) 10(-166,-68.9) 11(-166,-88.58) 12(-166,-108.27) 25(166,-108.27) 26(166,-88.58) 27(166,-68.9) 28(166,-49.21) 29(166,-29.53) 30(166,-9.84) 31(166,9.84) 32(166,29.53) 33(166,49.21) 34(166,68.9) 35(166,88.58) 36(166,108.27)
  rect 11x58 smd paste+0 mask+0: 13(-108.27,-166) 14(-88.58,-166) 15(-68.9,-166) 16(-49.21,-166) 17(-29.53,-166) 18(-9.84,-166) 19(9.84,-166) 20(29.53,-166) 21(49.21,-166) 22(68.9,-166) 23(88.58,-166) 24(108.27,-166) 37(108.27,166) 38(88.58,166) 39(68.9,166) 40(49.21,166) 41(29.53,166) 42(9.84,166) 43(-9.84,166) 44(-29.53,166) 45(-49.21,166) 46(-68.9,166) 47(-88.58,166) 48(-108.27,166)
  silkscreen extent -215,-215 215,215, body extent -181,-181 181,181, height 63
MTG-PTH-3MM [mm]
  round 5 hole 3.175: 0(0,0)
PHOENIX_1757242 [mm]
  rect 2.1x2.1 / inner round 2.1 / far side rect 2.1x2.1 hole 1.4: 01(-2.54,4)
  round 2.1 hole 1.4: 02(2.54,4)
  silkscreen extent -6.08,-6 6.08,7.15, body extent -6.02,-6.03 6.06,5.97, height 8.6
QFN50P500X500X80-33N [mm]
  rect 0.85x0.3 smd: 1(-2.45,1.75) 2(-2.45,1.25) 3(-2.45,0.75) 4(-2.45,0.25) 5(-2.45,-0.25) 6(-2.45,-0.75) 7(-2.45,-1.25) 8(-2.45,-1.75) 17(2.45,-1.75) 18(2.45,-1.25) 19(2.45,-0.75) 20(2.45,-0.25) 21(2.45,0.25) 22(2.45,0.75) 23(2.45,1.25) 24(2.45,1.75)
  rect 0.3x0.85 smd: 9(-1.75,-2.45) 10(-1.25,-2.45) 11(-0.75,-2.45) 12(-0.25,-2.45) 13(0.25,-2.45) 14(0.75,-2.45) 15(1.25,-2.45) 16(1.75,-2.45) 25(1.75,2.45) 26(1.25,2.45) 27(0.75,2.45) 28(0.25,2.45) 29(-0.25,2.45) 30(-0.75,2.45) 31(-1.25,2.45) 32(-1.75,2.45)
  rect 3.2x3.2 smd: 33(0,0)
  silkscreen extent -3,2.37 -2.75,2.62, body extent -2.5,-2.5 2.5,2.5, height 0.8
QFP50P900X900X120-49N [mm]
  rect 1.475x0.3 smd: 1(-4.238,2.75) 2(-4.238,2.25) 3(-4.238,1.75) 4(-4.238,1.25) 5(-4.238,0.75) 6(-4.238,0.25) 7(-4.238,-0.25) 8(-4.238,-0.75) 9(-4.238,-1.25) 10(-4.238,-1.75) 11(-4.238,-2.25) 12(-4.238,-2.75) 25(4.238,-2.75) 26(4.238,-2.25) 27(4.238,-1.75) 28(4.238,-1.25) 29(4.238,-0.75) 30(4.238,-0.25) 31(4.238,0.25) 32(4.238,0.75) 33(4.238,1.25) 34(4.238,1.75) 35(4.238,2.25) 36(4.238,2.75)
  rect 0.3x1.475 smd: 13(-2.75,-4.238) 14(-2.25,-4.238) 15(-1.75,-4.238) 16(-1.25,-4.238) 17(-0.75,-4.238) 18(-0.25,-4.238) 19(0.25,-4.238) 20(0.75,-4.238) 21(1.25,-4.238) 22(1.75,-4.238) 23(2.25,-4.238) 24(2.75,-4.238) 37(2.75,4.238) 38(2.25,4.238) 39(1.75,4.238) 40(1.25,4.238) 41(0.75,4.238) 42(0.25,4.238) 43(-0.25,4.238) 44(-0.75,4.238) 45(-1.25,4.238) 46(-1.75,4.238) 47(-2.25,4.238) 48(-2.75,4.238)
  rect 5.1x5.1 smd: 49(0,0)
  silkscreen extent -4.85,3.38 -4.6,3.62, body extent -4.51,-4.51 4.51,4.51, height 1.2
"RES 0402_1005" [mm] "Chip Resistor, 2-Leads, Body 1.0x0.5mm, IPC Medium Density"
  rect 0.75x0.6 smd: 1(-0.575,0) 2(0.575,0)
  silkscreen extent -1.14,-0.51 1.14,0.51, body extent -0.5,-0.25 0.5,0.25, height 0.35
"RES 0603_1608" [mm] "Chip Resistor, 2-Leads, Body 1.60x0.80mm, IPC Medium Density"
  rect 0.85x0.95 smd: 1(-0.65,0) 2(0.65,0)
  silkscreen extent -1.27,-0.7 1.27,0.7, body extent -0.8,-0.4 0.8,0.4, height 0.45
RES_0402 [mm]
  rect 0.56x0.6 smd: 1(-0.435,0) 2(0.435,0)
  body extent -0.5,-0.25 0.5,0.25, height 0.35
RESC0603X03L_C [mm] "Chip Resistor, 2-Leads, Body 0.6x0.3mm, IPC High Density"
  rect 0.27x0.3 smd: 1(-0.285,0) 2(0.285,0)
  silkscreen extent -0.49,-0.22 0.49,0.22, body extent -0.3,-0.15 0.3,0.15, height 0.23
RESC1608X55N [mm]
  rect 0.9x1 smd: 1(-0.8,0) 2(0.8,0)
  silkscreen extent 0,-0.33 0,0.33, body extent -0.8,-0.4 0.8,0.4, height 0.45
RESIS_0603 [mm]
  rect 1x1.05 smd: 1(-0.925,0) 2(0.925,0)
  silkscreen extent -0.05,-0.43 0.05,0.43, body extent -0.82,-0.4 0.82,0.4, height 0.5
RGE0024H [mm]
  rect 0.6x0.24 smd paste+0 mask+0: 1(-1.9,1.25) 2(-1.9,0.75) 3(-1.9,0.25) 4(-1.9,-0.25) 5(-1.9,-0.75) 6(-1.9,-1.25) 13(1.9,-1.25) 14(1.9,-0.75) 15(1.9,-0.25) 16(1.9,0.25) 17(1.9,0.75) 18(1.9,1.25)
  rect 0.24x0.6 smd paste+0 mask+0: 7(-1.25,-1.9) 8(-0.75,-1.9) 9(-0.25,-1.9) 10(0.25,-1.9) 11(0.75,-1.9) 12(1.25,-1.9) 19(1.25,1.9) 20(0.75,1.9) 21(0.25,1.9) 22(-0.25,1.9) 23(-0.75,1.9) 24(-1.25,1.9)
  rect 2.7x2.7 smd paste-1.337 mask+0: 25(0,0)
  round 0.5 / inner round 1.524 / far side round 0.5 hole 0.203 paste-2539.97 mask+0: V(-1.1,0) V(0,-1.1) V(0,0) V(0,1.1) V(1.1,0)
  silkscreen extent -2.22,-2.22 2.22,2.22, body extent -2,-2 2,2, height 1
Samtec_0_MFG [mm]
  rect 0.74x2.79 smd paste+0 mask+0: 1(-2.54,-2.035) 2(-2.54,2.035) 3(-1.27,-2.035) 4(-1.27,2.035) 5(0,-2.035) 6(0,2.035) 7(1.27,-2.035) 8(1.27,2.035) 9(2.54,-2.035) 10(2.54,2.035)
  silkscreen extent -4.12,-2.62 3.24,0.27, body extent -3.34,-3.53 3.34,3.53, height 0.25
SHDR3W50P0X200_1X3_790X460X630P [mm]
  rect 1.35x1.35 hole 0.9: 1(0,0)
  round 1.35 hole 0.9: 2(2,0) 3(4,0)
  silkscreen extent -1.95,-1.9 5.95,2.7, body extent -1.95,-1.87 5.95,2.78, height 6.06
SMBJ12A [mm]
  rect 2.2x2.15 smd: 1(-2.2,0) 2(2.2,0)
  silkscreen extent -2.68,-1.81 2.68,1.81, body extent -2.68,-1.86 2.68,1.86, height 2.33
SMC0603 [mm]
  rrect50% 0.6x0.85 smd: 1(-0.75,0) 2(0.75,0)
  silkscreen extent -1.2,-0.6 1.2,0.6, body extent -0.8,-0.4 0.8,0.4, height 0.81
SMC0805 [mm]
  rrect50% 0.7x1.25 smd: 1(-1,0) 2(1,0)
  silkscreen extent -1.5,-0.8 1.5,0.8, body extent -1,-0.62 1,0.63, height 0.86
"SMD 10.3x10.3x10.0mm" [mm] "PN: UUX2A470MNL1GS"
  rect 2.5x4 smd: 1(0,4) 2(0,-4)
  silkscreen extent -5.15,-5.15 5.15,6.98, body extent -5.15,-5.86 5.15,5.84, height 10.3
SMR0603 [mm]
  rrect50% 0.6x0.85 smd: 1(-0.75,0) 2(0.75,0)
  silkscreen extent -1.2,-0.6 1.2,0.6, body extent -0.8,-0.4 0.8,0.4, height 0.45
SODFL1608X70N [mm]
  rect 0.54x0.49 smd: 1(-0.8,0) 2(0.8,0)
  silkscreen extent -1.07,-0.4 0.6,0.4, body extent -0.8,-0.4 0.8,0.4, height 0.7
SOIC8 [mm]
  rect 1.5x0.65 smd: 1(-2.9,1.905) 2(-2.9,0.635) 3(-2.9,-0.635) 4(-2.9,-1.905) 5(2.9,-1.905) 6(2.9,-0.635) 7(2.9,0.635) 8(2.9,1.905)
  silkscreen extent -3.02,-2.5 1.75,2.9, body extent -2.96,-2.5 2.96,2.5, height 1.75
SOIC127P600X170-9N [mm]
  rect 1.525x0.65 smd: 1(-2.712,1.905) 2(-2.712,0.635) 3(-2.712,-0.635) 4(-2.712,-1.905) 5(2.712,-1.905) 6(2.712,-0.635) 7(2.712,0.635) 8(2.712,1.905)
  rect 2.4x3.1 smd: 9(0,0)
  silkscreen extent -3.47,2.58 -1.95,2.58, body extent -3,-2.45 3,2.45, height 1.57
SOIC127P600X175-16N [mm]
  rect 1.525x0.65 smd: 1(-2.712,4.445) 2(-2.712,3.175) 3(-2.712,1.905) 4(-2.712,0.635) 5(-2.712,-0.635) 6(-2.712,-1.905) 7(-2.712,-3.175) 8(-2.712,-4.445) 9(2.712,-4.445) 10(2.712,-3.175) 11(2.712,-1.905) 12(2.712,-0.635) 13(2.712,0.635) 14(2.712,1.905) 15(2.712,3.175) 16(2.712,4.445)
  silkscreen extent -3.47,-4.95 1.6,5.12, body extent -3.01,-4.95 3.01,4.95, height 1.75
SOT95P280X145-6N [mm]
  rect 1.2x0.6 smd: 1(-1.25,0.95) 2(-1.25,0) 3(-1.25,-0.95) 4(1.25,-0.95) 5(1.25,0) 6(1.25,0.95)
  silkscreen extent -1.85,-1.46 0.3,1.6, body extent -1.4,-1.46 1.4,1.46, height 1.45
SOT95P280X145-6N/LM74700QDBVRQ1 [mm]
  rrect25% 1.21x0.58 smd: 1(-1.255,0.95) 2(-1.255,0) 3(-1.255,-0.95) 4(1.255,-0.95) 5(1.255,0) 6(1.255,0.95)
  silkscreen extent -2.6,-1.56 0.8,1.56, body extent -1.4,-1.45 1.4,1.45, height 1.45
SOT95P285X140-5N [mm]
  rect 1.15x0.6 smd: 1(-1.3,0.95) 2(-1.3,0) 3(-1.3,-0.95) 4(1.3,-0.95) 5(1.3,0.95)
  silkscreen extent -1.88,-1.5 0.38,1.5, body extent -1.43,-1.5 1.43,1.5, height 1.4
SOT96P240X110-3N [mm]
  rect 1.1x0.65 smd: 1(-1.05,0.96) 2(-1.05,-0.96) 3(1.05,0)
  silkscreen extent -1.6,-1.45 0.15,1.54, body extent -1.33,-1.5 1.33,1.5, height 1.1
SRU10386R2Y [mm]
  rect 1.8x4 smd: 1(-4.5,0) 2(4.5,0)
  silkscreen extent -5,-5 5.08,5.08, body extent -5,-4.96 5,5.04, height 3.8
TEST_POINT [mm]
  round 1 smd: 1(0,0)
  silkscreen extent -0.6,-0.6 0.6,0.6
TRANS_CSD18540Q5B [mm]
  rect 1.372x0.71 smd paste-2: 1(-2.77,1.905) 2(-2.77,0.635) 3(-2.77,-0.635) 4(-2.77,-1.905)
  rect 1x1 smd paste-1 mask+0: 5_6_7_8(0,0)
  Top Layer region: 3.456,1.55 2.866,1.55 2.866,0.99 3.456,0.99 3.456,0.28 2.866,0.28 2.866,-0.28 3.456,-0.28 3.456,-0.99 2.866,-0.99 2.866,-1.55 3.456,-1.55 3.456,-2.26 -0.984,-2.26 -0.984,2.26 3.456,2.26
  silkscreen extent -4.23,-2.5 -1.3,2.5, body extent -3,-2.5 3,2.5, height 1.05
Vishay_IHLP-2525CZ-FP_2_413x3_429-3D_3_0_MFG [mil]
  rect 95x135 smd paste+0 mask+0: 1(-115,0) 2(115,0)
  silkscreen extent -132,-132 132,132, body extent -135,-127 135,127, height 118
VREG_LM5017MR/NOPB [mm]
  rrect5% 1.55x0.6 smd mask+0: 1(-2.7,1.905) 2(-2.7,0.635) 3(-2.7,-0.635) 4(-2.7,-1.905) 5(2.7,-1.905) 6(2.7,-0.635) 7(2.7,0.635) 8(2.7,1.905)
  rect 2.95x4.9 smd paste-3 mask+0: 9(0,0)
  round 0.3 hole 0.2: 10(-0.65,1.95) 11(0.65,1.95) 12(-0.65,0.65) 13(0.65,0.65) 14(-0.65,-0.65) 15(0.65,-0.65) 16(-0.65,-1.95) 17(0.65,-1.95)
  silkscreen extent -4.17,-2.52 1.95,2.52, body extent -3,-2.45 3,2.45, height 1.7
VREG_TLV75733PDRVR [mm]
  rrect5% 0.45x0.3 smd: 1(-0.975,0.65) 2(-0.975,0) 3(-0.975,-0.65) 4(0.975,-0.65) 5(0.975,0) 6(0.975,0.65)
  rect 1x1.6 smd paste-2: 7(0,0)
  round 0.3 hole 0.2 mask+0: 8(0,0.55) 9(0,-0.55)
  silkscreen extent -1.87,-1.12 1,1.12, body extent -1,-1 1,1, height 0.8
XTAL_ECS-80-8-30Q-VS-TR [mm]
  rect 1.9x2.4 smd: 1(-2.05,0) 2(2.05,0)
  silkscreen extent -2.64,-1.6 2.5,2.34, body extent -2.5,-1.6 2.5,1.6, height 1.1